# Altium PCB PCB1.PcbDoc (part 1 of 2)
Units mil, origin at the board's own origin, x right, y up, seen from the top; angles counter-clockwise.
Board outline 6000 x 4000 mil, 2 copper layers (Top Layer, Bottom Layer); 74 components, 70 nets, 267 pads, 158 vias.
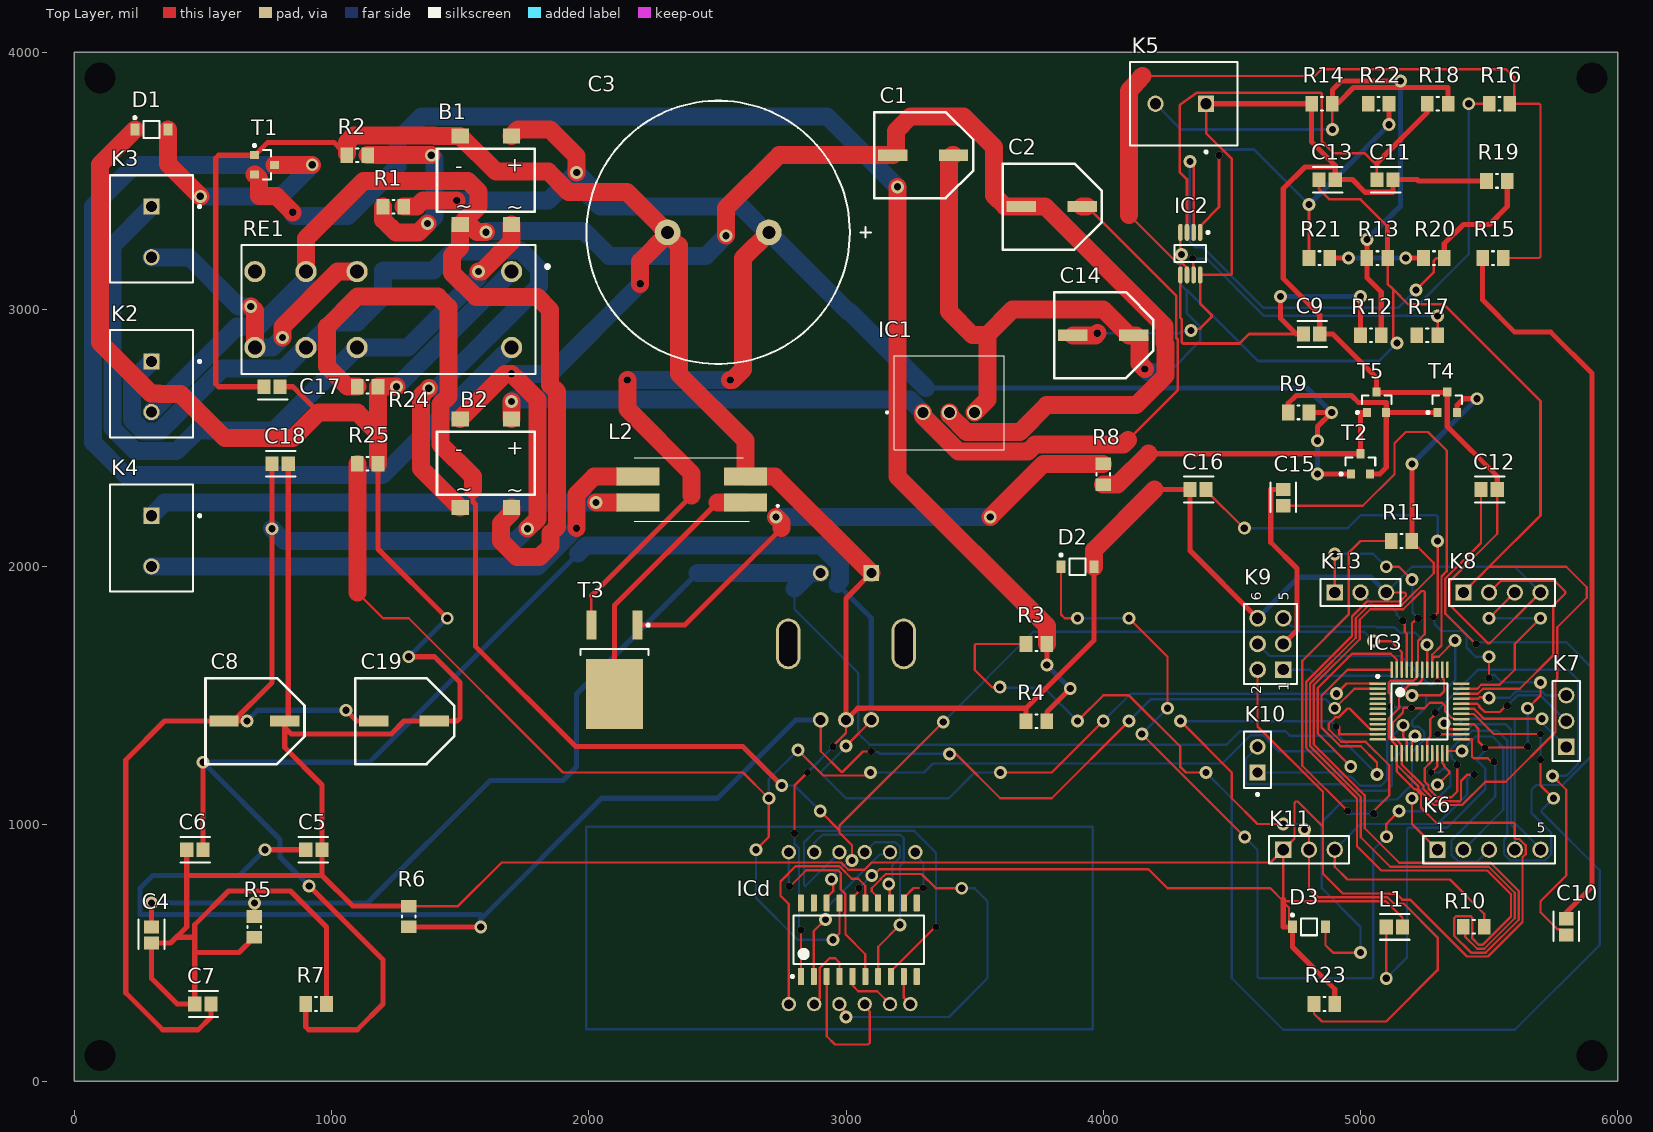
[diagram p0: Top Layer view]
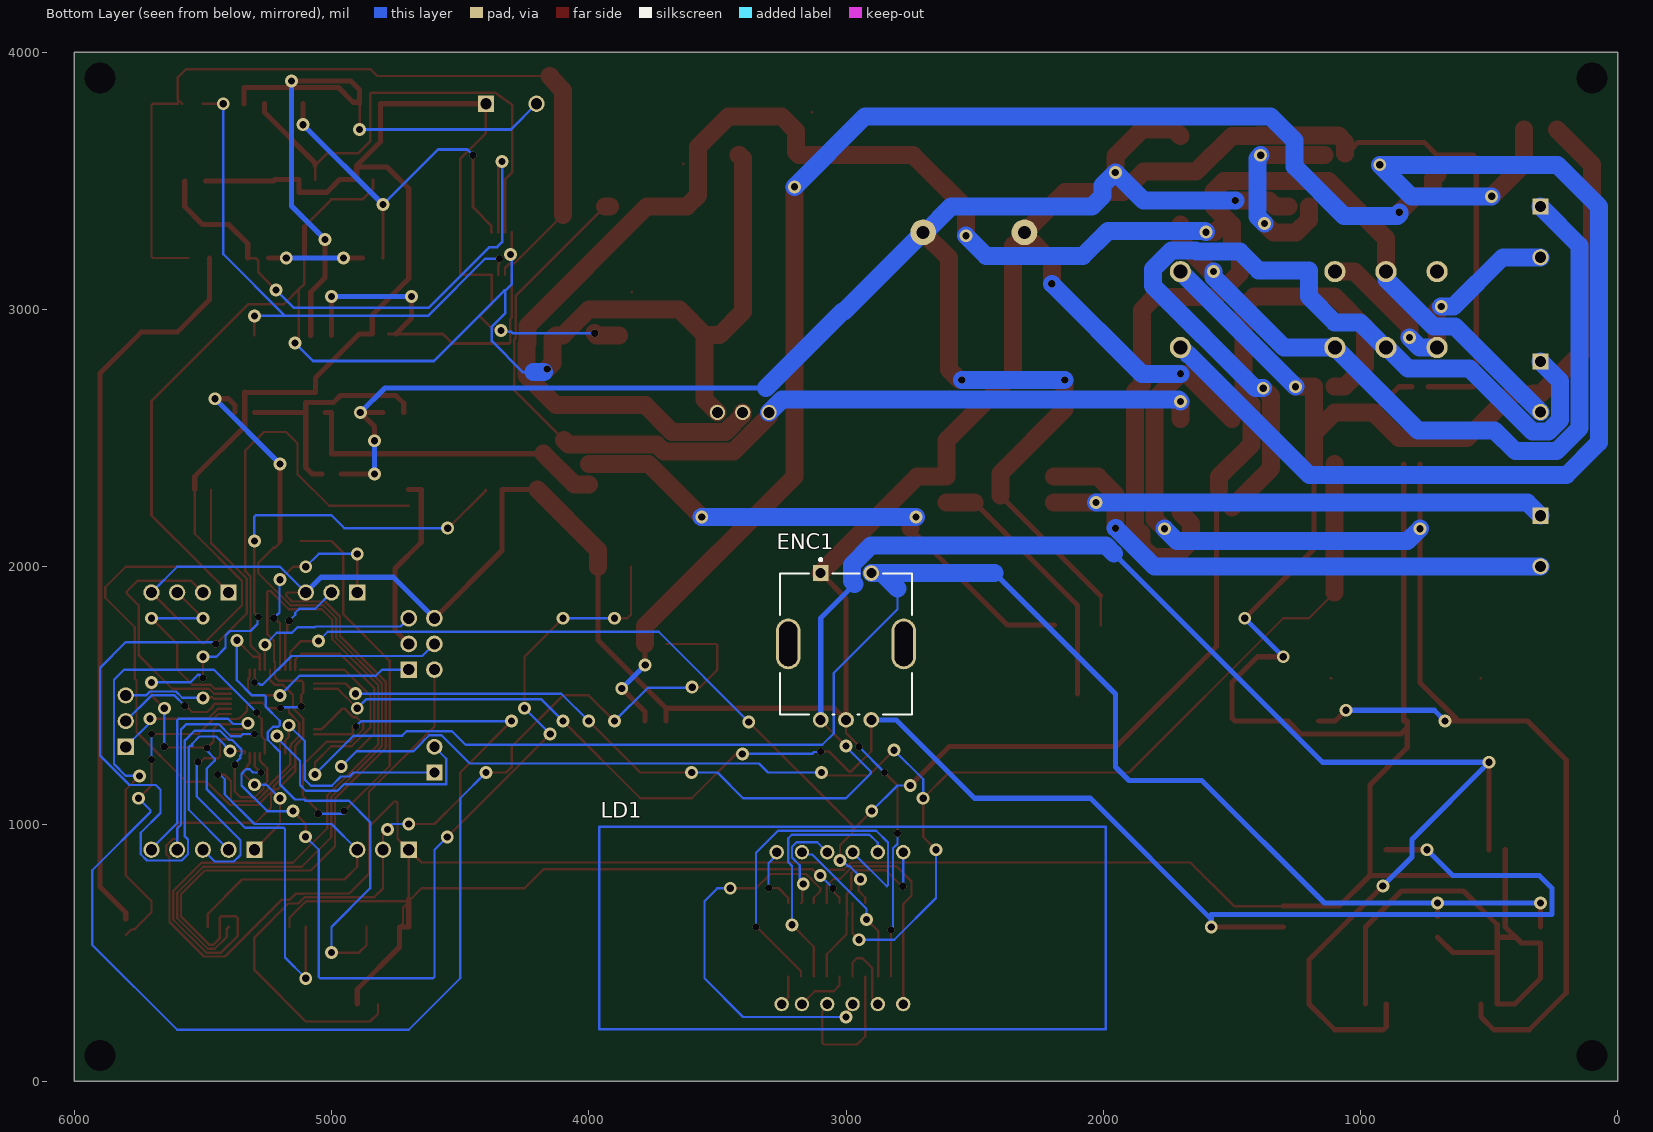
[diagram p1: Bottom Layer view, seen from below]

## Layer stack, top to bottom
Top Solder: solder mask 0.4, Solder Resist, Dk 3.5
Top Layer: signal copper 1.4
Dielectric 1: dielectric 12.6, FR-4, Dk 4.8
Bottom Layer: signal copper 1.4
Bottom Solder: solder mask 0.4, Solder Resist, Dk 3.5

## Board outline
0,0 6000,0 6000,4000 0,4000

## Design rules (kind name [scope] priority, off if disabled: settings)
Clearance [All] p1: gap=6 ignorepadtopadclearanceinfootprint=FALSE
ComponentClearance [All] p1: gap=5 collisioncheckmode=3 verticalgap=10 showdistances=FALSE
Height [All] p1: minheight=0 maxheight=5000 prefheight=500
HoleSize [All] p1: absolutevalues=TRUE maxlimit=200 minlimit=1 maxpercent=80.000 minpercent=20.000
MinimumSolderMaskSliver [All] p1: minsoldermaskwidth=0.5
PolygonConnect [All] p1: connectstyle=Relief reliefconductorwidth=10 reliefentries=4 polygonreliefangle="90 Angle" airgapwidth=10
RoutingVias [All] p1: holewidth=28 width=50 viastyle="Through Hole" minholewidth=28 minwidth=50 maxholewidth=28 maxwidth=50
SilkToSilkClearance [All] p1: silktosilkclearance=5
SilkToSolderMaskClearance [IsPad] p1: minsilkscreentomaskgap=5 clearancetoexposedcopper=TRUE
SolderMaskExpansion [All] p1: expansion=4 istentingtop=FALSE
Width [All] p1: maxlimit=100 minlimit=9 preferedwidth=9 minimp=50.000000 maximp=50.000000 favimp=50.000000
24 further rules are at their usual default settings.

## Classes and differential pairs
component class Voeding: B1 B2 C1 C2 C3 D1 D2 IC1 K2 K3 R1 R2 R3 R4 RE1 T1
component class Thermokoppel: C9 C10 C11 C12 C13 C14 IC2 K5 R12 R13 R14 R15 R16 R17 R18 R19 R20 R21 R22
component class PWM_soldeerbout: K4 L2 R8 R9 R10 R11 T2 T3 T4 T5
component class Display: C4 C5 C6 C7 C8 ENC1 ICd LD1 R5 R6 R7
component class CPU: C15 C16 C17 C18 C19 D3 IC3 K6 K7 K8 K9 K10 K11 K13 L1 R23 R24 R25

## Components (designator, comment, footprint, x,y, rotation, side; value= is the part's Value field where it differs from the comment)
B1 "D6KB6U" ttf 1600,3500 r0 top
B2 "D6KB6U" ttf 1600,2400 r0 top
C1 "10µ 50V" CE_D8_L10 3300,3600 r0 top
C2 "100µ 25V" CE_D8_L10 3800,3400 r0 top
C3 "4700µ 50V" CE_D25_L25_plugin 2306.3,3300 r0 top
C4 "10n" CC_0805_L 300,568.47 r90 top value="0.22 μF"
C5 "10n" CC_0805_L 931.53,900 r180 top value="0.22 μF"
C6 "10n" CC_0805_L 468.47,900 r0 top value="0.22 μF"
C7 "100n" CC_0805_L 500,300 r0 top value="0.22 μF"
C8 "100µ" CE_D8_L10 700,1400 r0 top
C9 "10n" CC_0805_L 4810.35,2905 r0 top value="0.22 μF"
C10 "10n" CC_0805_L 5800,600 r90 top value="0.22 μF"
C11 "10n" CC_0805_L 5095.35,3505 r0 top value="0.22 μF"
C12 "10n" CC_0805_L 5500,2300 r0 top value="0.22 μF"
C13 "100n" CC_0805_L 4870.35,3505 r0 top value="0.22 μF"
C14 "10µ" CE_D8_L10 4000,2900 r0 top
C15 "100n" CC_0805_L 4700,2268.47 r90 top value="0.22 μF"
C16 "100n" CC_0805_L 4368.47,2300 r0 top value="0.22 μF"
C17 "100n" CC_0805_L 768.47,2700 r0 top value="0.22 μF"
C18 "100n" CC_0805_L 800,2400 r0 top value="0.22 μF"
C19 "10µ" CE_D8_L10 1281.89,1400 r0 top
D1 "1N4007" SOD-123FL 300,3700 r0 top value=15pF
D2 "5V1" SOD-123FL 3900,2000 r0 top
D3 "Diode" SOD-123FL 4800,600 r0 top value=15pF
ENC1 "PEC11R-4220F-S0012" PEC11R_4220F_S0012 3000,1700 r180 bottom
IC1 "OKI-78SR-5/1.5-W36-C" OKI78SR515W36C 3299.21,2600 r0 top
IC2 "Dual_Opamp" MSOP_8_M 4338.39,3217.32 r270 top
IC3 "ATMEGA4809" TQFP_48_M 5229.53,1437.58 r0 top
ICd "TM1637" SOP_20_M 3050,550 r90 top
K2 "282836-2" TECO-282836-2_V 300,2700 r270 top
K3 "282836-2" TECO-282836-2_V 300,3301.57 r270 top
K4 "282836-2" TECO-282836-2_V 300,2100 r270 top
K5 "282836-2" TECO-282836-2_V 4301.58,3800 r180 top
K6 "" "pin header 1x5" 5500,900 r0 top
K7 "" "pin header 1x3" 5800,1400 r90 top
K8 "61300411121" "pin header 1x4" 5550,1900 r0 top
K9 "61300621121" "pin header 2x6" 4650,1700 r90 top
K10 "M20-9990246" "pin header 1x2" 4600,1250 r90 top
K11 "61300311121" "pin header 1x3" 4800,900 r0 top
K13 "61300311121" "pin header 1x3" 5000,1900 r0 top
L1 "Choke" CC_0805_L 5131.53,600 r0 top
L2 "" 2545 2400,2300 r90 top
LD1 "KW4-801AVB" 7-Segment 2974.41,300 r90 bottom
R1 "68K" R_0805_L 1240.35,3400 r0 top
R2 "10K" R_0805_L 1100,3600 r0 top
R3 "10K" R_0805_L 3740.35,1700 r0 top
R4 "4K7" R_0805_L 3740.35,1400 r0 top
R5 "10K" R_0805_L 700,600 r270 top
R6 "10K" R_0805_L 1300,640.35 r90 top
R7 "10K" R_0805_L 940.35,300 r180 top
R8 "100" R_0805_L 4000,2359.65 r90 top
R9 "4K7" R_0805_L 4759.65,2600 r0 top
R10 "4K7" R_0805_L 5440.35,600 r180 top
R11 "10K" R_0805_L 5159.65,2100 r0 top
R12 "5K6" R_0805_L 5040.35,2900 r0 top
R13 "1M" R_0805_L 5065.35,3200 r0 top
R14 "10M" R_0805_L 4850.35,3800 r0 top
R15 "100" R_0805_L 5515.35,3200 r0 top
R16 "18K" R_0805_L 5540.35,3800 r0 top
R17 "5K6" R_0805_L 5259.65,2900 r0 top
R18 "5K6" R_0805_L 5300.35,3800 r0 top
R19 "100" R_0805_L 5530.35,3500 r0 top
R20 "18K" R_0805_L 5285.35,3200 r0 top
R21 "18K" R_0805_L 4840.35,3200 r0 top
R22 "5K6" R_0805_L 5070.35,3800 r0 top
R23 "4K7" R_0805_L 4859.65,300 r0 top
R24 "4K7" R_0805_L 1140.35,2700 r0 top
R25 "4K7" R_0805_L 1140.35,2400 r0 top
RE1 "" RT42 1700,3000 r180 top
T1 "BC547" SOT_23 739.37,3562.6 r0 top
T2 "BC547" SOT_23 5000,2400 r90 top
T3 "IRF9Z34NPBF" TO_252 2100,1600 r270 top
T4 "BC547" SOT_23 5337.4,2639.37 r90 top
T5 "BC557" SOT_23 5062.6,2639.37 r90 top

## Footprints (in the part's own frame and the unit in brackets; to place one, negate y for a bottom-side part, rotate by r counter-clockwise, add the part's x,y. Pads: shape width x height; smd on the part's side, far side on the other; paste and mask are expansions set on the pad)
7-Segment [mm]
  round 1.425 hole 0.95: 1(0,-5) 2(0,-2.5) 3(0,0) 4(0,2.5) 5(0,5) 6(0,7) 7(15,-5) 8(15,-2.5) 9(15,0) 10(15,2.5) 11(15,5) 12(15,7.5)
  Top Layer lines w0.254: -2.5,-25 -2.5,15 -2.5,25 17.5,25 17.5,-25 -2.5,-25
2545 [mm]
  rect 1.78x4.27 smd: 1(-1.27,-5.305) 2(1.27,-5.305) 3(1.27,5.305) 4(-1.27,5.305)
  silkscreen extent -3.15,-8.6 3.15,5.69, body extent -3.15,-7.26 3.15,7.26, height 9.6
CC_0805_L [mil]
  rect 51.36x57.33 smd paste+0 mask+0: 1(-31.53,0) 2(31.53,0)
  silkscreen extent -55,-50 59,50, body extent -67,-39 67,39, height 10
CE_D8_L10 [mm]
  rect 2.9x1.1 smd: 1(-3,0) 2(3,0)
  Top Layer lines w0.254: -4.259,4.25 -4.25,4.241
  silkscreen extent -4.83,-4.25 4.95,4.25
CE_D25_L25_plugin [mm]
  round 2.54 hole 1.27: 1(0,0) 2(10,0)
  silkscreen extent -8,-13 20.07,13
MSOP_8_M [mm] "TSOP, 8-Leads, Body 3x3mm, Pitch 0.65mm, IPC Medium Density"
  oval 1.7x0.45 smd: 1(-2.1,0.975) 2(-2.1,0.325) 3(-2.1,-0.325) 4(-2.1,-0.975) 5(2.1,-0.975) 6(2.1,-0.325) 7(2.1,0.325) 8(2.1,0.975)
  silkscreen extent -2.22,-1.55 0.85,1.88, body extent -1.55,-1.55 1.55,1.55, height 1.1
OKI78SR515W36C [mm]
  round 1.519 hole 1.08: 1(0,0) 2(2.6,0) 3(5.1,0)
  silkscreen extent -3.6,-3.7 8.05,5.6, body extent -2.85,-3.7 8.05,5.6, height 16.6
PEC11R_4220F_S0012 [mm]
  rect 1.55x1.55 hole 1 paste-1000 mask+0: 1(-2.5,7)
  round 1.55 hole 1 paste-1000 mask+0: 2(2.5,7) A(-2.5,-7.5) B(2.5,-7.5) C(0,-7.5)
  rrect100% 2.4x5 hole 4.4 slot 1.8 at 0 deg paste-1000 mask+0: 3(-5.7,0) 4(5.7,0)
  silkscreen extent -6.5,-6.95 6.5,8.45, body extent -7,-7.7 7,7.2, height 27.3
"pin header 1x2" [mm]
  rect 1.57x1.57 hole 1.02 paste-1000 mask+0: 1(-1.27,0)
  round 1.57 hole 1.02 paste-1000 mask+0: 2(1.27,0)
  silkscreen extent -3.55,-1.32 2.79,1.32, body extent -2.89,-1.42 2.89,1.42, height 0.25
"pin header 1x3" [mm] "Pin Header, pitch 2.54 mm, THT, Vertical, single row, 3p"
  rect 1.6x1.6 hole 1.1: 1(-2.54,0)
  round 1.6 hole 1.1: 2(0,0) 3(2.54,0)
  silkscreen extent -3.96,-1.34 3.96,1.34, body extent -3.81,-1.27 3.81,1.27, height 8.57
"pin header 1x4" [mm] "Pin Header, pitch 2.54 mm, THT, Vertical, single row, 4p"
  rect 1.6x1.6 hole 1.1: 1(-3.81,0)
  round 1.6 hole 1.1: 2(-1.27,0) 3(1.27,0) 4(3.81,0)
  silkscreen extent -5.23,-1.34 5.23,1.34, body extent -5.08,-1.27 5.08,1.27, height 8.57
"pin header 1x5" [mm] "Pin Header, pitch 2.54 mm, THT, Vertical, single row, 5p"
  rect 1.6x1.6 hole 1.1: 1(-5.08,0)
  round 1.6 hole 1.1: 2(-2.54,0) 3(0,0) 4(2.54,0) 5(5.08,0)
  silkscreen extent -6.5,-1.34 6.5,1.34, body extent -6.35,-1.27 6.35,1.27, height 8.57
"pin header 2x6" [mm] "Pin Header, pitch 2.54 mm, THT, Vertical, dual row, 6p"
  rect 1.65x1.65 hole 1.1: 1(-2.54,-1.27)
  round 1.65 hole 1.1: 2(-2.54,1.27) 3(0,-1.27) 4(0,1.27) 5(2.54,-1.27) 6(2.54,1.27)
  silkscreen extent -3.96,-2.61 3.96,2.61, body extent -3.81,-2.54 3.81,2.54, height 8.59
R_0805_L [mm] "Chip Resistor, 2-Leads, Body 2.00x1.25mm, IPC Low Density"
  rect 1.25x1.55 smd: 1(-1.025,0) 2(1.025,0)
  silkscreen extent -0.1,-0.67 0.1,0.67, body extent -1.1,-0.72 1.1,0.72, height 0.5
RT42 [mm]
  round 2.1 hole 1.4: 11(20.3,-3.75) 12(15.26,-3.75) 14(25.34,-3.75) 21(20.3,3.75) 22(15.26,3.75) 24(25.34,3.75) A1(0,-3.75) A2(0,3.75)
  silkscreen extent -3.67,-6.35 26.65,6.35, body extent -2.21,-6.35 26.79,6.35, height 15.86
SOD-123FL [mm] "SOD, 2-Leads, Body 2.7x1.65mm"
  rect 0.91x1.22 smd: 1(-1.635,0) 2(1.635,0)
  silkscreen extent -1.76,-0.82 0.78,1.28, body extent -1.35,-0.82 1.35,0.82, height 1
SOP_20_M [mm] "SOIC,20-Leads,Body 12.9x5.6mm,Pitch 1.27mm,IPC Medium Density"
  rrect17% 1.65x0.6 smd: 1(-3.625,5.715) 2(-3.625,4.445) 3(-3.625,3.175) 4(-3.625,1.905) 5(-3.625,0.635) 6(-3.625,-0.635) 7(-3.625,-1.905) 8(-3.625,-3.175) 9(-3.625,-4.445) 10(-3.625,-5.715) 11(3.625,-5.715) 12(3.625,-4.445) 13(3.625,-3.175) 14(3.625,-1.905) 15(3.625,-0.635) 16(3.625,0.635) 17(3.625,1.905) 18(3.625,3.175) 19(3.625,4.445) 20(3.625,5.715)
  silkscreen extent -3.75,-6.45 2.4,6.69, body extent -2.8,-6.45 2.8,6.45, height 2
SOT_23 [mm] "SOT23, 3-Leads, Body 2.92x1.3mm, Pitch 0.95mm"
  rect 0.9x0.8 smd: 1(-1,0.95) 2(-1,-0.95) 3(1,0)
  silkscreen extent -1.12,-1.46 0.65,2.02, body extent -0.65,-1.46 0.65,1.46, height 1.11
TECO-282836-2_V [mm] "Female Header, Pitch 5mm, 1 x 2 Position, Height 10mm"
  rect 1.6x1.6 hole 1.1: 1(-2.5,0)
  round 1.6 hole 1.1: 2(2.5,0)
  silkscreen extent -5.6,-4.1 5,4.88, body extent -5.6,-4.1 5,4.1, height 10
TO_252 [mm] "DPAK, 3-Leads, Body 6.5x6.12mm, Pitch 2.28mm, IPC Low Density"
  rect 2.85x1 smd: 1(-4.4,2.28) 3(-4.4,-2.28)
  rect 6.9x5.65 smd: 2(2.4,0)
  silkscreen extent -4.52,-3.35 -1.45,3.46, body extent -2.05,-3.32 4.17,3.32, height 2.35
TQFP_48_M [mm]
  rect 1.655x0.252 smd paste+0 mask+0: 1(-4.125,2.75)
  rrect100% 1.655x0.252 smd paste+0 mask+0: 2(-4.125,2.25) 3(-4.125,1.75) 4(-4.125,1.25) 5(-4.125,0.75) 6(-4.125,0.25) 7(-4.125,-0.25) 8(-4.125,-0.75) 9(-4.125,-1.25) 10(-4.125,-1.75) 11(-4.125,-2.25) 12(-4.125,-2.75) 25(4.125,-2.75) 26(4.125,-2.25) 27(4.125,-1.75) 28(4.125,-1.25) 29(4.125,-0.75) 30(4.125,-0.25) 31(4.125,0.25) 32(4.125,0.75) 33(4.125,1.25) 34(4.125,1.75) 35(4.125,2.25) 36(4.125,2.75)
  rrect100% 0.252x1.655 smd paste+0 mask+0: 13(-2.75,-4.125) 14(-2.25,-4.125) 15(-1.75,-4.125) 16(-1.25,-4.125) 17(-0.75,-4.125) 18(-0.25,-4.125) 19(0.25,-4.125) 20(0.75,-4.125) 21(1.25,-4.125) 22(1.75,-4.125) 23(2.25,-4.125) 24(2.75,-4.125) 37(2.75,4.125) 38(2.25,4.125) 39(1.75,4.125) 40(1.25,4.125) 41(0.75,4.125) 42(0.25,4.125) 43(-0.25,4.125) 44(-0.75,4.125) 45(-1.25,4.125) 46(-1.75,4.125) 47(-2.25,4.125) 48(-2.75,4.125)
  silkscreen extent -4.25,-2.75 2.75,3.58, body extent -5.2,-5.2 5.2,5.2, height 0.25
ttf [mm]
  rect 1.7x1.5 smd: 1(2.54,4.445) 2(-2.54,4.445) 3(-2.54,-4.318) 4(2.54,-4.318)
  silkscreen extent -4.83,-3.03 4.83,3.17

## Part data
B1 B2: library part Bridge_Rectifier, Average Rectified Current-Max=0.8A, Forward Voltage=1V, Manufacturer="Diodes Inc", Package Description="4-Pin Small Outline Integrated Circuit, Body 4.7 x 3.8 mm, Pitch 2.5 mm", Package Reference=MiniDIP-4, Package Version=05/2016, Peak Current-Max=30A, Reverse Current-Max=5µA, Reverse Voltage-Max [Vrrm]=600V, Datasheet URL=http://www.diodes.com/_files/datasheets/ds17003.pdf, Datasheet Version="Rev. 13-2, 12/2010", Manufacturer URL=http://www.diodes.com/, Mounting Technology=SurfaceMount, Package URL=http://www.diodes.com/_files/packages/MiniDIP.pdf
C1 C2 C3 C8 C14 C19: library part Capacitor_Electrolytic, Manufacturer=Panasonic, Max Operating Temperature="105 degC", Min Operating Temperature="-55 degC", Package Quantity=500, Voltage Rating="25 V", ComponentLink1Description="Manufacturer URL", ComponentLink1URL=http://www.panasonic.com/, ComponentLink2Description=Datasheet, ComponentLink2URL=http://industrial.panasonic.com/cdbs/www-data/pdf/RDE0000/ABA0000C1181.pdf, DatasheetVersion=03/2016, Height="10.2 mm", Lead Pitch="3.1 mm", Length="10.2 mm", Mount="Surface Mount", Mounting Technology="Surface Mount", PackageDescription="2-Pin Electrolytic Aluminum Capacitor, Body 8.3 x 8.3 mm", PackageReference=EEE-FK1E221P, Packaging="Tape and Reel", Pins=2, REACH SVHC="No SVHC", RoHSCompliant=true
C4 C5 C6 C7 C9 C10 C11 C12 C13 C15 C16 C17 C18: library part Capacitor_Ceramic, Capacitance="0.22 μF", Manufacturer=KEMET, Manufacturer Part Number=C0805C224K5RACTU, Package=C0805C-DN, Temperature="-55°C to +125°C", Temperature Characteristic=X7R, Temperature Coefficient=30ppm/°C, Temperature Range High=+125°C, Temperature Range Low=-55°C, Tolerance=0.1, Voltage Rating="50 V", Automotive=No, Category=Cap, ComponentLink2Description=Datasheet, ComponentLink2URL=https://content.kemet.com/datasheets/KEM_C1003_C0G_SMD.pdf, Device Class L1="Passive Components", Device Class L2=Capacitors, Device Class L3="Ceramic Capacitors", Digikey Description="CAP CER 0.22UF 50V X7R 0805", Height=0.88mm, Ipc Land Pattern Name=CAPC200125X78, Lead Free=Yes, Material=Ceramic, Mouser Description="CAP CER 0.22UF 50V X7R 0805", Octopart=https://octopart.com/c0805c224k5ractu-kemet-144670, RoHS=TRUE
D1: library part Diode, Capacitance=15pF, Forward Current=1A, Manufacturer=Diotec, Max Junction Temp=+175°C, Max Repetitive Reverse Voltage=1000V, Max Surge Forward Current=27A, Peak Reverse Current=5uA, Temperature="-50°C to +175°C", Temperature Range Low=-50°C, Automotive=No, Category=Diode, ComponentLink2Description=Datasheet, ComponentLink2URL=https://datasheet.octopart.com/1N4007-Diotec-datasheet-62346875.pdf, Device Class L1="Discrete Semiconductors", Device Class L2=Diodes, Device Class L3="Rectifier Diodes", Height=2.8mm, Ipc Land Pattern Name=DIOAD888W100L520D280, Lead Free=Yes, Manufacturer Part Number=1N4007, Octopart=https://octopart.com/1n4007-diotec-4040411, Package=1N4007, Reverse Voltage=1000V, RoHS=TRUE, Temperature Range High=+175°C
D2: library part Zener_Diode, Manufacturer="On Semiconductor", PartNumber=1SMB5920BT3G, ComponentLink1Description="Manufacturer URL", ComponentLink1URL=http://www.onsemi.com/, ComponentLink2Description=Datasheet, ComponentLink2URL=http://www.onsemi.com/pub_link/Collateral/1SMB5913BT3-D.PDF, ComponentLink3Description="Package Specification", ComponentLink3URL=http://www.onsemi.com/pub_link/Collateral/1SMB5913BT3-D.PDF, DatasheetVersion="Rev. 8", Mounting Technology="Surface Mount", PackageDescription="2-Pin Small Molded Package, J-Bend Lead, Body 4.33 x 3.625 mm", PackageReference=SMB-2-403A-03_H, PackageVersion="Rev. H, 05/2011", Packing="Tape and Reel", RoHS=Pb-Free, VZ Typ (V)=6.2
D3: Capacitance=15pF, Forward Current=1A, Manufacturer=Diotec, Manufacturer Part Number=1N4007, Max Junction Temp=+175°C, Max Repetitive Reverse Voltage=1000V, Max Surge Forward Current=27A, Peak Reverse Current=5uA, Temperature="-50°C to +175°C", Temperature Range Low=-50°C, Automotive=No, Category=Diode, ComponentLink2Description=Datasheet, ComponentLink2URL=https://datasheet.octopart.com/1N4007-Diotec-datasheet-62346875.pdf, Device Class L1="Discrete Semiconductors", Device Class L2=Diodes, Device Class L3="Rectifier Diodes", Height=2.8mm, Ipc Land Pattern Name=DIOAD888W100L520D280, Lead Free=Yes, Octopart=https://octopart.com/1n4007-diotec-4040411, Package=1N4007, Reverse Voltage=1000V, RoHS=TRUE, Temperature Range High=+175°C
ENC1: "ROTARY ENCODER MECHANICAL 12PPR", Max Operating Temperature=70°C, Min Operating Temperature=-30°C, Package Quantity=150, Built in Switch=Yes, Detent=Yes, Encoder Type=Mechanical, Height=13.4mm, Hole Diameter=7mm, Length=26.5mm, Mount="Through Hole", Number of Channels=2, Number of Pins=5, Orientation=Vertical, Output Type=Quadrature, Packaging=Bulk, Pulses per Revolution=12, Radiation Hardening=No, REACH SVHC="No SVHC", RoHS Compliant=Yes, Series=PEC11R, Termination="PC Pin", Type=Mechanical, Width=12.5mm
IC1: "Non-Isolated DC/DC Converter, 7.5 W, 7 to 36 V, 1.5 A, -40 to 85 degC, 3-Pin THD, RoHS", Current - Output (Max)=1.5A, Manufacturer=Murata, Operating Temperature=-40degC~85degC, Package / Case=3-SIPModule, Power (Watts) - Manufacture Series=8W, Voltage - Input (Max)=36V, Voltage - Input (Min)=7V, Voltage - Isolation=-, Voltage - Output 1=5V, Applications=ITE(Commercial), Category=PowerSupplies-BoardMount, Datasheet URL=https://datasheet.ciiva.com/8006/1790439-8006672.pdf, Datasheet Version=Oct-13, Efficiency=90.5%, Family=DCDCConverters, Features=SCP, Manufacturer URL=http://www.murata.com/, Mounting Type=ThroughHole, Number of Outputs=1, Packaging=Tube, Power (Watts) - Max=8W, Series=Okami™OKI-78SR, Size / Dimension="0.41\"Lx0.30\"Wx0.65\"H(10.4mmx7.6mmx16.5mm)", Type=LinearRegulatorReplacement, Voltage - Output 2=-, Voltage - Output 3=-
IC2: Case/Package=PDIP, Input Bias Current=1pA, Input Offset Voltage (Vos)=4.5mV, Max Operating Temperature=125°C, Max Supply Voltage=6V, Min Operating Temperature=-40°C, Min Supply Voltage=1.8V, Nominal Supply Current=100uA, Operating Supply Voltage=5.5V, Output Current=23mA, Package Quantity=60, Power Supply Rejection Ratio (PSRR)=86dB, Voltage Gain=112dB, Amplifier Type="GENERAL PURPOSE", Bandwidth=1MHz, Common Mode Rejection Ratio=60dB, Gain Bandwidth Product=1MHz, Height=3.3mm, Input Offset Voltage-Max=4.5mV, Lead Free="Lead Free", Length=9.27mm, Mount="Through Hole", Number of Amplifiers=2, Number of Channels=2, Number Of Circuits=2, Number of Elements=2, Number of Pins=8, Operating Supply Current=100uA, Output Current per Channel=23mA, Packaging=Rail/Tube, Radiation Hardening=No, REACH SVHC="No SVHC", RoHS Compliant=Yes, Slew Rate=0.6V/µs, Slew Rate-Nom=0.6V/µs, Supply Current=100uA, Technology=CMOS, Unity Gain Bandwidth Product=1MHz, Width=6.35mm
IC3: Case/Package=TQFP, Max Operating Temperature=85°C, Min Operating Temperature=-40°C, Core Architecture=AVR, Interface=I2C, Memory Size=48KB, Memory Type=FLASH, Mount="Surface Mount", Number of I/Os=41, Oscillator Type=Internal, Peripherals="Brown-out Detect/Reset", RoHS Compliant=Yes, Series="megaAVR® 0, Functional Safety (FuSa)"
ICd: "LED Drive Control Special Circuit", Package=Package, Availability="Not in stock", Check_prices=https://www.snapeda.com/parts/TM1637/Titan+Micro+Electronics/view-part/?ref=eda, MF="Titan Micro Electronics", MP=TM1637, Price=None, SnapEDA_Link=https://www.snapeda.com/parts/TM1637/Titan+Micro+Electronics/view-part/?ref=snap
K2 K3 K4 K5: library part CMP-1684-00017-1, "Female Header, Pitch 5 mm, 1 x 2 Position, Height 10 mm, Tail Length 3.5 mm, Rohs, Bulk", Color=Green, Current=13.5A, Manufacturer="TE Connectivity", Package Description="Female Header, Pitch 5 mm, 1 x 2 Position, Height 10 mm, Tail Length 3.5 mm", Package Reference=THD, Standard Package=300, Voltage=300V, 3D Model=282836-2.pdf, Category=Connectors,Interconnects, Clamp Material - Plating=Brass-NickelPlated, Contact Material - Plating=Brass-TinPlated, Datasheet URL=http://www.te.com.cn/commerce/DocumentDelivery/DDEController?Action=showdoc&DocId=Catalog+Section%7F1308389_EUROSTYLE_TERMINAL_BLOCKS%7F0607%7Fpdf%7FEnglish%7FENG_CS_1308389_EUROSTYLE_TERMINAL_BLOCKS_0607.pdf%7F282836-2, Dynamic Catalog=BuchananSeries, Family=TerminalBlocks-WiretoBoard, Featured Product=EurostyleTerminalBlockConnectors, Features=Interlocking(Side), Housing Material=Polyamide(PA66),Nylon6/6, Manufacturer URL=http://www.te.com, Mating Orientation=HorizontalwithBoard, Mounting Type=ThroughHole, Number of Levels=1, Other Names="5ULV-02B / A98076", Packaging=Bulk, Pitch="0.197\"(5.00mm)", Positions Per Level=2, Product Training Modules=Wire-to-BoardEurostyleTerminalBlocks, RoHS Information=282836-2StatementofCompliance, Screw Material - Plating=Brass-NickelPlated, Screw Thread=M3, Series=Buchanan, Torque - Screw=0.68Nm(6Lb-In), Wire Gauge=16-30AWG, Wire Termination=Screw-RisingCageClamp
K6: library part "pin header 1x5", "THT Vertical Pin Header WR-PHD, Pitch 2.54 mm, Single Row, 5 pins", Contact Resistance=20mOhm, Manufacturer="Wurth Elektronik", Operating Temperature=-40to105degC, Package Reference=61300511121, Rated Current=3A, Withstanding Voltage=500VAC, Working Voltage=250VAC, Datasheet URL=https://katalog.we-online.de/em/datasheet/6130xx11121.pdf, Gender=Male, Manufacturer URL=http://www.we-online.de, Mounting Technology=THT, Orientation=Vertical, Packaging=Bag, Part Number=61300511121, Pin Number=5, Pitch=2.54mm, Publisher=WurthElektronik, Row Number=Single
K7: library part "pin header 1x3pin", "THT Vertical Pin Header WR-PHD, Pitch 2.54 mm, Single Row, 3 pins", Contact Resistance=20mOhm, Manufacturer="Wurth Elektronik", Operating Temperature=-40to105degC, Package Reference=61300311121, Rated Current=3A, Withstanding Voltage=500VAC, Working Voltage=250VAC, Datasheet URL=https://katalog.we-online.de/em/datasheet/6130xx11121.pdf, Gender=Male, Manufacturer URL=http://www.we-online.de, Mounting Technology=THT, Orientation=Vertical, Packaging=Bag, Part Number=61300311121, Pin Number=3, Pitch=2.54mm, Publisher=WurthElektronik, Row Number=Single
K8: library part "pin header 1x4", "THT Vertical Pin Header WR-PHD, Pitch 2.54 mm, Single Row, 4 pins", Contact Resistance=20mOhm, Manufacturer="Wurth Elektronik", Operating Temperature=-40to105degC, Rated Current=3A, Withstanding Voltage=500VAC, Working Voltage=250VAC, Datasheet URL=https://katalog.we-online.de/em/datasheet/6130xx11121.pdf, Gender=Male, Manufacturer URL=http://www.we-online.de, Mounting Technology=THT, Orientation=Vertical, Package Reference=61300411121, Packaging=Bag, Part Number=61300411121, Pin Number=4, Pitch=2.54mm, Publisher=WurthElektronik, Row Number=Single
K9: library part "pin header 2x6", "THT Vertical Pin Header WR-PHD, Pitch 2.54 mm, Dual Row, 6 pins", Contact Resistance=20mOhm, Manufacturer="Wurth Elektronik", Operating Temperature=-40to105degC, Rated Current=3A, Withstanding Voltage=500VAC, Working Voltage=250VAC, Datasheet URL=https://katalog.we-online.de/em/datasheet/6130xx21121.pdf, Gender=Male, Manufacturer URL=http://www.we-online.de, Mounting Technology=THT, Orientation=Vertical, Package Reference=61300621121, Packaging=Bag, Part Number=61300621121, Pin Number=6, Pitch=2.54mm, Publisher=WurthElektronik, Row Number=Dual
K10: library part "pin header 1x2", "CONN HEADER VERT 2POS 2.54MM", Current Rating=3A, Manufacturer=Harwin, Temperature="-40°C to +105°C", Temperature Range High=+105°C, Temperature Range Low=-40°C, Automotive=No, Category=Conn, ComponentLink2Description=Datasheet, ComponentLink2URL=https://cdn.harwin.com/pdfs/M20-999.pdf, Conn Gender=Male, Conn Orientation=Vertical, Contact Material=Tin,Nickel, Device Class L1=Connectors, Device Class L2="Headers and Wire Housings", Device Class L3=unset, Digikey Description="CONN HEADER VERT 2POS 2.54MM", Height=8.99mm, Lead Free=Yes, Manufacturer Part Number=M20-9990246, Mouser Description="2.54mm (0.1\") Pitch SIL Vertical PC Tail Pin Header, 6.1mm mating pin height, tin, 2 contacts", Number Of Contacts=2, Number Of Rows=1, Octopart=https://octopart.com/m20-9990246-harwin-2590635, Package=M20-9990246, Pitch=2.54mm, RoHS=TRUE
K11 K13: library part "pin header 1x3pin", "THT Vertical Pin Header WR-PHD, Pitch 2.54 mm, Single Row, 3 pins", Contact Resistance=20mOhm, Manufacturer="Wurth Elektronik", Operating Temperature=-40to105degC, Rated Current=3A, Withstanding Voltage=500VAC, Working Voltage=250VAC, Datasheet URL=https://katalog.we-online.de/em/datasheet/6130xx11121.pdf, Gender=Male, Manufacturer URL=http://www.we-online.de, Mounting Technology=THT, Orientation=Vertical, Package Reference=61300311121, Packaging=Bag, Part Number=61300311121, Pin Number=3, Pitch=2.54mm, Publisher=WurthElektronik, Row Number=Single
L1: "smoorspoel", Case/Package=1350, Current Rating=8.5A, DC Resistance (DCR)=14.1mR, Inductance=10uH, Inductance Tolerance=20%, Max Operating Temperature=155°C, Min Operating Temperature=-40°C, Package Quantity=1, Ratings=AEC-Q200, Resistor Type=Wirewound, Saturation Current=10A, Self Resonant Frequency=18MHz, Series Resistance=14.1R, Test Frequency=100kHz, Height=4.7mm, Height - Seated (Max)=0.197inch, Length=0.512inch, Max DC Current=8.5A, Mount="Surface Mount", Packaging="Tape and Reel", RMS Current (Irms)=8.5A, RoHS Compliant=Yes, Series=WE-HCI, Shielding=Shielded, Termination=SMD/SMT, Tolerance=20%, Width=12.8mm
L2: library part Common_Mode_Choke, Case/Package=1808, Current=2A, Current Rating=2.3A, DC Resistance (DCR)=60mR, Insulation Resistance=10MR, Max Operating Temperature=85°C, Max Voltage Rating (DC)=50V, Min Operating Temperature=-40°C, Package Quantity=1, Test Frequency=100MHz, DC Current=2A, DC Resistance-Max=60mR, Depth=4.7mm, Element Configuration=Dual, Height=2mm, Impedance=900R, Lead Free="Lead Free", Length=0.185inch, Max Current Rating=2A, Max DC Current=2A, Mount="Surface Mount", Number of Lines=2, Number of Pins=4, Packaging="Tape and Reel", Radiation Hardening=No, REACH SVHC="No SVHC", RoHS Compliant=Yes, Series=ACM, Termination=Flat, Voltage Rating=50V, Voltage Rating (DC)=50V, Width=4.5mm
LD1: "4-Digit LED Display"
R1 R2 R3 R4 R5 R6 R7 R8 R9 R10 R11 R12 R13 R14 R15 R16 R17 R18 R19 R20 R21 R22 R23 R24 R25: library part "0805 (Resistor)", "Resistor", Manufacturer="Vishay Dale", Part Number=CRCW08050000Z0EA
RE1: library part RELAY_GENERAL_PURPOSE, Ambient Temperature Range High=+85°C, Ambient Temperature Range Low=-40°C, Coil Power=403mW, Coil Resistance=62Ω, Coil Voltage=5V, Current Rating=8A, Manufacturer="TE Connectivity", Manufacturer Part Number=RT424005, Automotive=No, Category=Relay, Coil Type=Non-Latching, ComponentLink2Description=Datasheet, ComponentLink2URL=https://www.te.com/commerce/DocumentDelivery/DDEController?Action=showdoc&DocId=Data+Sheet%7FRT2%7F1014%7Fpdf%7FEnglish%7FENG_DS_RT2_1014.pdf%7F5-1393243-9, Device Class L1=Electromechanical, Device Class L2=Relays, Device Class L3="Power Relays", Digikey Description="RELAY GENERAL PURPOSE DPDT 8A 5V", Height=15.7mm, Lead Free=Yes, Mouser Description="General Purpose Relay, Rt2 Series, Power, Non Latching, Dpdt, 5 Vdc, 8 A Rohs Compliant: Yes", Number Of Contacts=2, Octopart=https://octopart.com/5-1393243-9-te+connectivity-41835766, Package=RT424005, RoHS=TRUE, Throw Configuration=DPDT
T1 T2 T4: library part Transistor_NPN, Manufacturer="On Semiconductor", PartNumber=BC547C, ComponentLink1Description="Manufacturer URL", ComponentLink1URL=http://www.onsemi.com/, ComponentLink2Description=Datasheet, ComponentLink2URL=http://www.onsemi.com/pub_link/Collateral/BC546-D.PDF, ComponentLink3Description="Package Specification", ComponentLink3URL=http://www.onsemi.cn/pub_link/Collateral/2N6426-D.PDF, DatasheetVersion="Rev. 7", fT Min (MHz)=150, IC Continuous (A)=0.1, Mounting Technology="Through Hole", PackageDescription="3-Pin Transistor Outline, Body 4.825 x 3.685 mm, Pitch 1.27 mm", PackageReference=TO-92-3-29-11_AM_SL, PackageVersion="Rev. AM", Packing="Bulk Box", Polarity=NPN, RoHS=FALSE
T3: library part MOSFET_P, Continuous Drain Current Id=2.4A, Current Temperature=25°C, Drain Source Voltage Vds=20V, Manufacturer="Fairchild Semiconductor", On Resistance Rds(on)=52mohm, Operating Temperature Max=150°C, Operating Temperature Min=-55°C, Operating Temperature Range=-55°Cto+150°C, Package / Case=SOT-23, Package Description="3-Pin Small Outline Transistor, Body 2.92 x 1.4 mm, Pitch 0.95 mm", Package Reference=SSOT3L, Package Version="Rev. 3, 05/2015", Power Dissipation Pd=500mW, Pulse Current Idm=10A, Rds(on) Test Voltage Vgs=-4.5V, Threshold Voltage Vgs Typ=-800mV, Voltage Vds Typ=-20V, Voltage Vgs th Max=-1.5V, Current Id Max=2.4A, Datasheet URL=https://www.fairchildsemi.com/datasheets/FD/FDN304P.pdf, Datasheet Version="Rev. C, 01/2001", External Depth=2.5mm, External Length / Height=1.12mm, External Width=3.05mm, Full Power Rating Temperature=25°C, Manufacturer URL=https://www.fairchildsemi.com/, Mounting Technology=SurfaceMount, No. of Pins=3, Package URL=https://www.fairchildsemi.com/package-drawings/MA/MA03B.pdf, Reel Quantity=3000, SMD Marking=304P, SVHC=NoSVHC(19-Dec-2012), Tape Width=8mm, Termination Type=SMD, Transistor Case Style=SOT-23, Transistor Polarity=PChannel, Voltage Vds=20V, Voltage Vgs Max=-800mV, Voltage Vgs Rds on Measurement=-4.5V
T5: library part Transistor_PNP, Manufacturer="On Semiconductor", PartNumber=BC557C, ComponentLink1Description="Manufacturer URL", ComponentLink1URL=http://www.onsemi.com/, ComponentLink2Description=Datasheet, ComponentLink2URL=http://www.onsemi.com/pub_link/Collateral/BC556B-D.PDF, ComponentLink3Description="Package Specification", ComponentLink3URL=http://www.onsemi.cn/pub_link/Collateral/2N6426-D.PDF, DatasheetVersion="Rev. 3", IC Continuous (A)=-0.1, Mounting Technology="Through Hole", PackageDescription="3-Pin Transistor Outline, Body 4.825 x 3.685 mm, Pitch 1.27 mm", PackageReference=TO-92-3-29-11_AM_SL, PackageVersion="Rev. AM", Packing="Bulk Box", Polarity=PNP, RoHS=FALSE

## Free pads (board coordinates)
  round 60 hole 120: 2(100,3900) 3(5900,3900) 5(100,100)
  round 100 hole 120: 4(5900,100)

## Via types
v1: diameter 50, hole 28, Top Layer to Bottom Layer, 116 vias
v2: diameter 28, hole 28, Top Layer to Bottom Layer, 42 vias

## Nets (pads, with @x,y where several pads share a name; then routed paths per layer and width w, separated by ;. In a path a pad name is that pad's centre, name@x,y a point inside that pad or via, vN(x,y) a via of type N, cw(c..) or ccw(c..) an arc to the next point about the centre after c; other vN are vias at no path point)
+5: C1.2 C4.1 C5.1 C6.1 C7.1 C8.2 C13.1 C14.2 C17.2 C18.2 C19.2 D1.1 D3.1 IC1.3 IC2.4 IC3.14 IC3.42 ICd.16 K8.1 K9.2 K11.1 L1.2 R5.2 R6.2 R7.1 R13.2 R23.2 R24.2 R25.2 RE1.A1 | length 28622.5
  Top Layer w9: R6.2 1491.71,680.71 1661.53,850.53 2980.8,850.53 3008.92,822.41 3072.21,822.41 3100.33,850.53 4650.53,850.53 K11.1@4693,893 ; ICd.16 3025,713.39 3046.36,734.75 3046.36,746.36 v2(3050,750) ; v1(3100,800) 3105.45,800 3129.95,824.5 4175.5,824.5 4250,750 4650,750 4700,700 ; K9.2 4600,1379.43 4854,1125.43 4854,989.4 ; 4700,709 K11.1@4700,886 ; K11.1 4743.4,943.4 4743.4,1082 4748.67,1087.27 4756.12,1087.27 4854,989.4 ; D3.1 4722.22,613.41 4722.22,674.78 4700,697 4700,700 ; 5140.95,1230 IC3.14 5140.95,1303.03 5136.73,1307.24 5136.73,1309.18 5110.19,1335.72 5110.19,1410.4 5150.45,1450.65 5150.45,1460.15 5150,1460.59 5150,1501.55 5190.37,1541.92 5221.29,1541.92 5239.37,1560 IC3.42 ; L1.2 5163.05,635.95 5099,700 4700,700 ; K8.1 5465,1965 ; 5500,2000 5800,2000 5879.5,1920.5 5879.5,1879.5 5765,1765 5765,1565 5758,1558 5758,1358 5564.4,1164.4 5485.61,1164.4 5394.94,1073.73 5286.31,1073.73 5225.04,1134.99 5225.04,1145.96 5141,1230 5141,1204.54 5210.04,1135.5 5214.7,1135.5 5235.5,1114.7 5235.5,1064.5 5295,1005 5594.73,1005 5600,999.73 5600,946.47 5604.74,941.73 5617.66,941.73 5642,917.4 5642,882.6 5630,870.61 5630,619 5496,485 5414,485 5193,706 5162.76,706 5140.35,728.41 5113.02,728.41 5111.43,730 4931,730 4854,807 4854,989.4
  Top Layer w10: v1@4300,3203.11 IC2.4 ; C13.1 4838.83,3469.17 4880,3428 5000,3428 5105.71,3322.29 ; R13.2 5105.71,3100 5128,3077.71 ; v1(5142,2870) 5128,2884 5128,3077.71 ; 5465,1965 5500,2000 5700,2200 5700,2644 5324,3020 5185.71,3020 5128,3077.71
  Top Layer w20: C6.1 436.95,800 ; R5.2 640.35,500 468.47,500 ; C17.2 850,2700 950,2600 ; C18.2 831.53,1400 C8.2 818,1400 818,1375 ; R7.1 980.71,600 840.71,740 600,740 468.47,608.47 468.47,559.65 ; R25.2 1180.71,2069.29 v1(1450,1800) ; R6.2 1082.35,680.71 963.05,800 ; v1(1300,1650) 1400,1650 1500,1550 1500,1411.72 1488.28,1400 C19.2 1282,1400 1232,1350 843,1350 818,1375 ; 4700,697 4700,600 D3.1 4735.63,522 4900,357.63 R23.2 ; 4700,700 4700,709 ; K11.1@4700,886 K11.1 ; R13.2 5105.71,3322.29 ; 373.89,536.95 436.95,600 436.95,800 ; 373.89,536.95 374,536.95 396.7,559.65 468.47,559.65 ; 373.89,536.95 C4.1 300,400 400,300 C7.1 468.47,500 ; 436.95,800 963.05,800 ; 468.47,500 468.47,559.65 ; 818,1375 818,1297 963.05,1151.95 C5.1 963.05,800
  Top Layer w70: D1.1 100,3564.37 100,2872 297.93,2674.07 330.03,2674.07 332.1,2672 413,2672 585,2500 850,2500 950,2600 1100,2600 1181,2519 ; R25.2 1181,2400 1181,2519 ; v1(1252.36,2700) R24.2 1181,2699.71 1181,2519 ; C1.2 3413.35,3600 3400,3586.65 3400,2992 3491.01,2900.99 3548.99,2900.99 3550,2902 ; IC1.3 3550,2650 3550,2902 ; v2(4161.7,2769.18) 4140.2,2790.69 4140.2,2886.65 4126.85,2900 4100,2900 4000,3000 3648,3000 3550,2902
  Bottom Layer w9: v2(3050,750) v1(3100,800)
  Bottom Layer w10: 4214.99,2757 4257,2757 4377,2877 4377,2933.34 4324,2986.34 4324,3073.96 ; v1(4304.56,3214.11) 4300,3203.11 4300,3097.96 4324,3073.96 ; v1(5142,2870) 5072,2800 4601.73,2800 4327.76,3073.96 4324,3073.96
  Bottom Layer w20: v1(1300,1650) v1(1450,1800)
  Bottom Layer w70: v1(1252.36,2700) RE1.A1 ; 4173.89,2757 4214.99,2757
GND: B1.2 B2.2 C3.1 C7.2 C8.1 C9.2 C11.2 C12.2 C13.2 C14.1 C16.1 C17.1 C18.1 C19.1 D2.2 ENC1.1 ENC1.C IC2.8 IC3.15 IC3.29 IC3.43 ICd.1 K5.1 K8.4 K9.6 K11.3 K13.3 L2.2 R2.1 R4.1 R10.1 R14.1 R19.1 T1.1 T4.3 T5.3 | length 30666.3
  Top Layer w9: v2(2800,963.98) 2800,1150 v2(2850,1200) ; ICd.1 v2(2825,588) ; v2(2950,1300) 2950,1303.35 3000,1353.35 ENC1.C ; K11.3 4900,834 4950,784 5347.71,784 5480.71,651 R10.1 ; K13.3 5170.79,1900 5176.06,1894.73 5176.06,1887.27 5153.79,1865 5025.81,1865 4967.02,1806.21 4967.02,1730.66 4788.79,1552.43 4788.79,1296.52 4986.5,1098.8 4986.5,913.5 5081,819 5492.79,819 5585,726.79 5585,640.21 5474.79,530 5460.21,530 5435.11,555.11 5435.11,634.86 5428.96,641.01 5371.04,641.01 5364.89,634.86 5364.89,565.14 5430.03,500 5487.21,500 5615,627.79 5615,739.21 5505.21,849 5151,849 5016.5,983.5 5016.5,1111.23 4818.79,1308.94 4818.79,1540 4997.02,1718.24 4997.02,1793.79 5038.24,1835 5166.21,1835 5237.27,1906.06 5244.73,1906.06 5250,1900.79 5250,1738.2 5223.5,1711.7 5223.5,1672.09 5223.9,1671.69 5223.9,1632.08 5219.69,1627.87 IC3.43 5219.69,1572.13 5215.47,1567.92 5215.47,1565.98 5206.41,1556.92 5117.11,1556.92 5110.19,1550 5110.19,1509.94 5117.67,1502.46 v2(5117.67,1457.26) ; v2@5194.86,1450 v2(5198.5,1451.5) ; IC3.29 5364.08,1408.05 5359.87,1412.27 5355.2,1412.27 5328.5,1438.97 5328.5,1460 5316.89,1471.61 5269.61,1471.61 5248,1450 5200,1450 v2(5198.5,1451.5) ; v2@5440.71,1199.9 v2(5442.26,1192.05) 5416.05,1192.05 5391,1167 5391,1094 5385.73,1088.73 5292.52,1088.73 5244.7,1136.54 5244.7,1147.51 5160.81,1231.4 5160.81,1274.98 IC3.15 5160.63,1303.03 5156.42,1307.24 5156.42,1310.71 5125.19,1341.93 5125.19,1393.38 5165.45,1433.64 5165.45,1446.23 5170.72,1451.5 v2(5198.5,1451.5) ; C12.2 5531.53,2128.53 5348,1945 5348,1850 5495.27,1702.73 5502.73,1702.73 K8.4
  Top Layer w10: v1(4341,2918.43) 4348.65,2926.08 4376.08,2926.08 4420.86,2970.86 4420.86,2979.14 4376.77,3023.23 IC2.8 4494.14,3134.64 4500,3140.5 4500,3585.36 4400,3685.36 K5.1
  Top Layer w20: C7.2 531.53,250 481.53,200 344,200 200,344 200,1249 351,1400 C8.1 C8.1@619,1400 ; v1(671,1400) C8.1@619,1400 ; C17.1 561.72,2700 550,2711.72 550,3588.28 561.72,3600 T1.1 701.97,3600 751.97,3650 1009.65,3650 1039.13,3620.51 1045.04,3620.51 1059.65,3605.91 R2.1 ; C18.1 v1(768.47,2148) 768.47,1549.47 C8.1@619,1400 ; v1(1056,1442) 1098,1400 C19.1 ; ENC1.1 3000,1877.16 ENC1.C 3045.28,1450 3077.92,1450 3079.16,1451.24 3117.69,1451.24 3118.93,1450 3700,1450 ; R4.1 3700,1450 ; D2.2 3964.37,1714.37 3700,1450 ; 4200,2300 C16.1 4336.95,2063.05 K9.6 ; K5.1 R14.1 4810,3652 4901.88,3560.12 4901.88,3554 ; T4.3 T4.3@5337.4,2678 ; R19.1 5226,3500 5221,3505 C11.2 5126.88,3456 5018,3456 4969,3505 C13.2 4901.88,3554 ; C12.2 5531.53,2351.47 5337.4,2545.6 T4.3@5337.4,2678 ; 4901.88,3554 4784,3554 4700,3470 4700,3120.88 4841.88,2979 C9.2 4892,2905 5062.6,2734.4 T5.3 5062.6,2678 T4.3@5337.4,2678
  Top Layer w70: R2.1@1059.65,3605.91 1059.65,3650 1085.65,3676 1401,3676 1402,3675 B1.2 1639,3536 1842.52,3536 1921.52,3457 2149.3,3457 C3.1 C3.1@2306.3,3293.4 ; B2.2 1675,2750 v2(1700,2750) ; 1716.49,2733.51 1800,2650 1800,2186 v1(1762,2148) ; v2(2200,3100) 2200,3187.1 C3.1@2306.3,3293.4 ; ENC1.1 2724.02,2350 L2.2 2608.86,2491.14 2350,2750 2350,3248.18 2306.3,3291.88 C3.1@2306.3,3293.4 ; C14.1 3969,2900 v2(3977,2908) ; D2.2 3964.37,2064.37 4200,2300
  Bottom Layer w9: v2(2800,963.98) 2800,922.63 2817,905.63 2817,596 v2(2825,588) ; v2(2850,1200) v2(2950,1300) ; K11.3 5000,1000 5300,1000 5415,1115 5415,1174.19 v2@5440.71,1199.9 ; K13.3 5200,2000 5600,2000 K8.4 ; v2(5117.67,1457.26) 5120.55,1454.38 5190.48,1454.38 v2@5194.86,1450
  Bottom Layer w10: v2(3977,2908) 4296,2908 4301,2913 4335.57,2913 v1(4341,2918.43)
  Bottom Layer w20: v1(671,1400) 713,1442 v1(1056,1442) ; K9.6 4759,1959 5041,1959 K13.3
  Bottom Layer w70: v1(768.47,2148) 816.47,2100 1714,2100 v1(1762,2148) ; v2(1700,2750) 1850,2750 v2(2200,3100)
K2: IC3.46 ICd.18 R24.1 | length 6914.2
  Top Layer w9: v1(2900,1050) 2975,975 ; ICd.18 2925,713.39 2950,738.39 2950,779.07 v1(2944.04,785.03) ; v1(3023.62,857.91) 3023.62,917.36 2975,965.98 2975,975 ; v1(3378,1397) 2975,994 2975,975 ; v1(5051,1711) 5118.63,1711 5160.63,1669 IC3.46
  Top Layer w20: 1549.54,2300 1549.54,2252.59 1559,2243.12 1559,1691 1949,1301 2599,1301 v1(2750,1150)
  Top Layer w70: R24.1 1062,2700 983.13,2778.87 983.13,2933.13 1100,3050 1412.99,3050 1454,3008.99 1454,2662.52 1424,2632.52 1424,2476 1549.54,2350.46 1549.54,2300
  Bottom Layer w9: v1(2750,1150) 2800,1150 v1(2900,1050) ; v1(2944.04,785.03) 2944.04,794.04 2985.36,835.36 2991.73,835.36 3014.28,857.91 v1(3023.62,857.91) ; v1(3378,1397) 3728,1747 5015,1747 v1(5051,1711)
K4: IC3.47 ICd.17 R25.1 | length 6668.1
  Top Layer w9: 1100,1900 1200,1800 1300,1800 1900,1200 2600,1200 v1(2700,1100) 2700,950 v1(2650,900) ; v1(2812.92,1287.08) 2911.27,1188.73 3083.59,1188.73 v1(3094.86,1200) ; v1(2950,550) 2975,575 ICd.17 ; v1(4962,1224) 4833.79,1352.21 4833.79,1528.51 4967.27,1662 5117.95,1662 5140.95,1639 IC3.47
  Top Layer w70: 1100,1900 R25.1
  Bottom Layer w9: v1(2650,900) 2650,712.8 2812.8,550 v1(2950,550) ; v1(2700,1100) 2700,1174.16 v1(2812.92,1287.08) ; v1(3094.86,1200) 3303,1200 3338.5,1235.5 4462.5,1235.5 4572.41,1345.41 4620,1345.41 4645,1320.41 4645,1319 4681,1283 4903,1283 v1(4962,1224)
NetB1_3: B1.3 B2.4 C1.1 C2.1 IC1.2 K2.2 RE1.11 | length 8588.4
  Top Layer w70: RE1.11 900.79,3276.79 1124,3500 1530,3500 1571.01,3458.99 1571.01,3401.01 B1.3@1517.67,3347.67 ; v1(1600,3300.7) 1564.65,3300.7 1535.35,3330 B1.3 1500,3241 1469,3210 1469,3142.48 1562.48,3049 1800,3049 1850,2999 1850,2707.48 1876,2681.48 1876,2154.52 1852,2130.52 1852,2081.01 1808.99,2038 1721,2038 1659,2100 1659,2169 1700,2210 B2.4 ; v1(2534,3287) 2534,3395 2739,3600 C1.1 3194,3612.11 3194,3694 3250,3750 3457.48,3750 3576,3631.48 3576,3443 3619,3400 C2.1 3774.48,3400 4238,2936.48 4238,2869.46 4243,2864.46 4243,2743 4128.2,2628.2 3780.24,2628.2 3676.04,2524 3468.52,2524 3401.57,2590.95 IC1.2
  Bottom Layer w70: K2.2 633.13,2934.7 716.18,2934.7 898.36,3116.88 898.36,3145.21 RE1.11 ; v1(1600,3300.7) 1605.28,3305.98 1982.15,3305.98 2079.13,3209 2456,3209 v1(2534,3287)
NetB1_4: B1.4 K3.1 RE1.22 | length 2929.4
  Top Layer w70: v1(1570.96,3148) 1583.92,3148 1700,3264.08 B1.4
  Bottom Layer w70: K3.1 148,3248 148,2538.61 237.04,2449.57 398.09,2449.57 478.52,2530 776.85,2530 RE1.22 1297.24,2852.36 1570.96,3126.08 v1(1570.96,3148)
NetB2_1: B2.1 C2.2 IC1.1 | length 3729.1
  Top Layer w10: C2.2@3937,3400 4284,3053 4284,2888.52 4289,2883.52 4289,2685.52 4096.64,2493.16
  Top Layer w70: B2.1 v1(1700,2642.52) ; IC1.1 3299.21,2585.83 3437.04,2448 3707.52,2448 3735.52,2476 4079.48,2476 4096.64,2493.16 ; C2.2 C2.2@3937,3400
  Bottom Layer w70: v1(1700,2642.52) 1707.48,2650 3249.21,2650 IC1.1
NetB2_3: B2.3 K2.1 RE1.21 | length 3441
  Top Layer w70: v1(1378,2694) 1348,2664 1348,2382 B2.3
  Bottom Layer w70: K2.1 224,2722.43 224,2570.09 268.52,2525.57 331.48,2525.57 575.93,2770.02 815.02,2770.02 897.36,2852.36 RE1.21 904.22,2852.36 1001.86,2950 1100,2950 1200,3050 1200,3151.57 1200.43,3152 1395.48,3152 1468.18,3224.7 1636.91,3224.7 1642.19,3229.98 1734.11,3229.98 1807,3157.08 1807,3092 1409,2694 v1(1378,2694)
NetC9_1: C9.1 IC2.5 R12.1 | length 1387.7
  Top Layer w10: IC2.5 4300,2968 4305,2963 4305,2873.86 4310.86,2868 4530,2868 4567,2905 4750,2905 C9.1
  Top Layer w20: v1(4689,3051) 4689,2966 4750,2905 ; R12.1 v1(5000,3051)
  Bottom Layer w20: v1(4689,3051) v1(5000,3051)
NetC10_2: C10.2 R15.1 | length 2867.9
  Top Layer w20: R15.1 5475,3037 5600,2912 5740,2912 5900,2752 5900,756 5800,656 C10.2
NetC11_1: C11.1 IC2.3 R18.1 | length 1889.2
  Top Layer w10: IC2.3 4325.59,3505.77 4296.77,3534.58 4296.77,3793.63 4302.63,3799.49 4363.95,3842.5 4835.86,3842.86 4844.14,3842.86 4850,3837 4850,3654 4897,3607 5016.83,3607 5063.83,3560 C11.1
  Top Layer w20: 5063.83,3560 5063.83,3569.83 5260,3766 R18.1
NetC15_1: C15.1 D3.2 IC3.40 | length 3757.7
  Top Layer w9: C15.1 5008.95,2236.95 5132,2360 5132,2480 5176,2524 5263,2524 5335.5,2451.5 5335.5,1983.07 5315,1962.57 5315,1693.92 5278.74,1657.66 5278.74,1640 ; D3.2 4864.37,528.74 4893.11,500 v1(5000,500) ; IC3.40 5278.74,1640 ; v1(5368,1714) 5304,1650 5288.74,1650 5278.74,1640
  Bottom Layer w9: v1(5000,500) 5000,600 4850,750 4850,1007.98 4932.52,1090.5 5102,1090.5 5107,1095.5 5141.5,1095.5 5200,1154 5200,1279.94 5247.91,1327.85 5247.91,1357.26 5227.12,1378.05 5206.78,1378.05 5201.51,1383.32 5201.51,1401.51 5255.27,1455.27 5255.27,1494.73 5260.54,1500 5309.5,1500 5368,1558.5 v1(5368,1714)
NetC15_2: C15.2 K9.3 | length 713.2
  Top Layer w20: K9.3 4753,1753 4753,1993 4651,2095 4651,2300 C15.2
NetC16_2: C16.2 IC3.28 L1.1 | length 3995.7
  Top Layer w9: C16.2 4400,2297.02 4547.02,2150 v1(4548.51,2150) ; v1(5100,400) L1.1 ; v2(5284,1805.14) 5300,1821.14 v1(5300,2100) ; IC3.28 5440.42,1388.37 5459,1369.79 5459,1320.5 v2(5484.5,1295) 5484.5,1284.5 5487,1297.5 v2@5647.5,1297.5 ; v2@5500,1565.5 v1(5500,1650) ; v1(5650,1450) 5700,1500 v1(5700,1550.5)
  Bottom Layer w9: v1(4548.51,2150) 4950,2150 5000,2200 5294.73,2200 5300,2194.73 v1(5300,2100) ; v1(5100,400) 5180.92,480.92 5180.92,979.73 5186.2,985 5335,985 5485.6,1135.6 5485.6,1214.6 5453.83,1246.37 5453.83,1253.83 5484.5,1284.5 v2@5487,1297.5 ; v2(5284,1805.14) 5287.64,1796.36 5287.64,1777.36 5315,1750 5394.73,1750 5411.9,1732.83 5411.9,1685.69 5447.59,1650 v1(5500,1650) ; v2(5500,1567) 5512.77,1579.77 5520.23,1579.77 5549.5,1550.5 v1(5700,1550.5) ; v2@5647.5,1297.5 v2(5650,1300) v1(5650,1450)
NetD1_2: D1.2 RE1.A2 T1.3 | length 4667.1
  Top Layer w70: D1.2 364.37,3565.63 v1(490,3440) ; T1.3 v1(925,3562.6)
  Bottom Layer w70: v1(490,3440) 802.4,3440 v1(925,3562.6) 234.6,3562.6 72,3400 72,2484 200,2356 1198.52,2356 1668.52,2826 1670.21,2826 1696.57,2852.36 RE1.A2
NetIC2_1: IC2.1 R21.1 R22.2 | length 1506.8
  Top Layer w10: IC2.1 4379.29,3302.52 4379.29,3327.13 4450,3397.83 v2(4450,3600) ; R21.1 v1(4800,3408)
  Top Layer w20: v1(5110.71,3718.71) R22.2
  Bottom Layer w10: v2(4450,3600) 4472,3622 4586,3622 v1(4800,3408)
  Bottom Layer w20: v1(4800,3408) v1(5110.71,3718.71)
NetIC2_2: IC2.2 R19.2 R20.2 | length 2255.6
  Top Layer w10: v1(4337,3575) 4351.18,3560.82 IC2.2 ; v1(5216,3076) 5285,3145 5285,3190 5295,3200 R20.2
  Top Layer w20: R20.2 5325.71,3256.71 5400,3331 5501.71,3331 5570.71,3400 R19.2
  Bottom Layer w10: v1(4337,3575) 4337,3262 4356.58,3242.42 4385.87,3242.42 4621.28,3007 5147,3007 v1(5216,3076)
NetIC2_6: IC2.6 R15.2 R16.2 | length 3611.8
  Top Layer w9: 4100,3368.46 4289.85,3178.61 4308.02,3178.61 4325.59,3161.04 IC2.6 ; 4152.23,3908.01 4822.01,3908.01 4848,3934 5566,3934 5597.54,3902.46 5597.54,3816.83 R16.2 ; R15.2 5694.73,3200 5700,3205.27 5700,3794.73 5694.73,3800 5597.86,3800 5597.86,3805.41 R16.2@5595.4,3807.87
  Top Layer w70: 4100,3368.46 4100,3850 4149.42,3905.2 ; 4102.27,3852.53 4102.32,3852.59 ; 4102.28,3852.55 4102.32,3852.59 ; 4102.31,3852.58 4149.42,3905.2 ; 4102.32,3852.59 4149.42,3905.2 ; 4102.32,3852.59 4149.42,3905.2 ; 4102.32,3852.59 4149.42,3905.2 ; 4149.42,3905.2 4149.59,3905.37 ; 4149.59,3905.37 4152.23,3908.01 4149.59,3905.37
NetIC2_7: IC2.7 R16.1 R17.2 | length 2187.3
  Top Layer w10: v2(4346.53,3197.03) 4351.18,3165.7 IC2.7 ; R17.2 v1(5300,2975) ; v1(5421,3800) R16.1
  Bottom Layer w10: v2(4346.53,3197.03) 4350.52,3197.62 4402.38,3197.62 4625,2975 5180,2975 ; v1(5300,2975) 5180,2975 ; v1(5421,3800) 5421,3216 5180,2975
NetIC3_11: IC3.11 K11.2 R23.1 | length 3079.2
  Top Layer w9: v1(4300,1400) 4500,1200 4500,1100 4600,1000 v1(4700,1000) ; v1(4782.68,978.43) 4800,961.11 K11.2 4800,749.41 4834.41,715 5105.21,715 5129.21,691 5168,691 5300,559 5300,432 5100,232 4850,232 4819.29,262.71 R23.1 ; v2(4905.22,1379.04) 4916.32,1379.04 4917.36,1377.99 4917.36,1349 IC3.11
  Bottom Layer w9: v1(4300,1400) 4884.26,1400 v2(4905.22,1379.04) ; v1(4700,1000) 4765.35,1000 4782.68,982.68 v1(4782.68,978.43)
NetIC3_16: IC3.16 K10.1 | length 887.3
  Top Layer w9: v1(5166.01,1383.99) 5166.01,1338.75 5180.32,1324.44 IC3.16
  Bottom Layer w9: K10.1 4914.49,1200 4930,1184.49 4963.42,1184.49 4999.5,1148.41 5080,1148.41 5103.5,1171.91 5103.5,1321.49 v1(5166.01,1383.99)
NetIC3_17: IC3.17 K10.2 | length 1053.2
  Top Layer w9: IC3.17 5200.18,1275.34 5200.18,1319.23 5212.41,1331.46 v1(5212.41,1342.55)
  Bottom Layer w9: K10.2 4554,1254 4554,1154.5 4951.5,1154.5 4976.59,1129.41 5100,1129.41 5122.5,1151.91 5122.5,1245.5 5212.41,1335.41 v1(5212.41,1342.55)
NetIC3_23: IC3.23 K6.1 | length 515.4
  Top Layer w9: v1(5200,1100) 5200,1000 K6.1 ; v1(5300,1152.67) 5344.84,1197.5 5344.84,1204.96 5325.22,1224.57 5325.22,1230.05 5318.29,1236.98 5318.29,1274.98 IC3.23
  Bottom Layer w9: v1(5200,1100) 5252.67,1152.67 v1(5300,1152.67)
NetIC3_24: IC3.24 K6.2 | length 735
  Top Layer w9: IC3.24 5337.8,1284 v1(5394,1284)
  Bottom Layer w9: v1(5394,1284) 5415,1305 5415,1307 5448,1340 5514,1340 5541.77,1312.23 5541.77,1304.74 5549.26,1304.74 5555,1299 5555,1055 K6.2
NetIC3_25: IC3.25 K6.3 | length 813.2
  Top Layer w9: IC3.25 5433.5,1329.31 5433.5,1262 5440,1255.5 5494.91,1255.5 5508.41,1242 v2(5519.5,1242)
  Bottom Layer w9: K6.3 5454,854 5380,854 5354,880 5354,937 5524,1107 5524,1237.5 v2(5519.5,1242)
NetIC3_26: IC3.26 K6.4 | length 882.5
  Top Layer w9: v2(5300,1350) 5300.82,1349.18 5391.77,1349.18 IC3.26
  Bottom Layer w9: v2(5300,1350) 5344.09,1350 5352.57,1341.52 5391.52,1341.52 5438.37,1388.37 5563.96,1388.37 5585,1367.33 5585,997.42 5600,982.42 K6.4
NetIC3_27: IC3.27 K6.5 | length 907.8
  Top Layer w9: v1(5325.4,1391.72) 5348.43,1368.68 IC3.27
  Bottom Layer w9: v1(5325.4,1391.72) 5328.8,1388.46 5381.69,1388.46 5402.23,1409 5594.73,1409 5600,1403.73 5600,1003.63 5700,903.63 K6.5
NetIC3_31: IC3.31 K7.1 | length 478.1
  Top Layer w9: IC3.31 5442.2,1447.42 5480.27,1409.35 v1(5706,1409.35)
  Bottom Layer w9: v1(5706,1409.35) 5706,1394 K7.1
NetIC3_32: IC3.32 K7.2 | length 490.9
  Top Layer w9: IC3.32 5454.09,1467.11 5461.2,1460 5461.2,1457.32 5483.04,1435.48 5541.08,1435.48 5565.6,1460 v2(5571,1460)
  Bottom Layer w9: v2(5571,1460) 5611,1500 5700,1500 K7.2
NetIC3_33: IC3.33 K7.3 | length 427.3
  Top Layer w9: IC3.33 5457.8,1486.79 5463.16,1492.16 5498.34,1492.16 v1(5500,1490.5)
  Bottom Layer w9: v1(5500,1490.5) 5580.29,1490.5 5604.79,1515 5706.21,1515 5721.21,1500 K7.3
NetIC3_34: IC3.34 K8.2 | length 1019.6
  Top Layer w9: IC3.34 5456.27,1506.48 5475.99,1526.19 5483.44,1526.19 5483.64,1526 5619.52,1526 5750,1656.48 5750,1850 5796.27,1896.27 5796.27,1903.73 5754,1946 5546,1946 K8.2
NetIC3_35: IC3.35 K8.3 | length 821.6
  Top Layer w9: IC3.35@5391.95,1526.16 5454.74,1526.16 5469.78,1541.19 5489.66,1541.19 5489.85,1541 5541,1541 5600,1600 5600,1700 v1(5700,1800) ; v1(5500,1800) K8.3
  Bottom Layer w9: v1(5500,1800) v1(5700,1800)
NetIC3_38: IC3.38 K9.1 | length 759.5
  Top Layer w9: v1(5200,1500) 5309,1500 5324.5,1515.5 5324.5,1560.15 5322.33,1562.32 5322.33,1567.91 5318.29,1571.95 5318.29,1599.82 IC3.38
  Bottom Layer w9: K9.1 4804,1600 4828,1576 5124,1576 v1(5200,1500)
NetIC3_39: IC3.39 K9.4 | length 820.2
  Top Layer w9: IC3.39 5298.61,1599.82 5298.61,1551.39 v2(5300,1550)
  Bottom Layer w9: K9.4 4647,1653 5156,1653 5268,1541 5276.86,1541 5282.22,1546.36 5296.36,1546.36 v2(5300,1550)
NetIC3_41: IC3.41 K9.5 | length 698.7
  Top Layer w9: v1(5259,1697) 5259.06,1696.94 IC3.41
  Bottom Layer w9: K9.5 4732,1768 5061.02,1768 5064.02,1765 5132.3,1765 5154.06,1743.24 5212.76,1743.24 v1(5259,1697)
NetIC3_44: IC3.44 K13.1 | length 865
  Top Layer w9: K13.1 v1(4900,2050) ; v1(5100,2000) 5150,2000 v1(5200.1,1949.9) ; IC3.44 5200,1780.25 5206.36,1786.61 5206.97,1786.61 5220.36,1800 v2(5224.84,1800)
  Bottom Layer w9: v1(4900,2050) 5050,2050 v1(5100,2000) ; v1(5200.1,1949.9) 5202.54,1947.46 5202.54,1822.3 v2(5224.84,1800)
NetIC3_45: IC3.45 K13.2 | length 410.2
  Top Layer w9: v2(5164.5,1790.1) 5164.5,1786.55 5172.34,1775.16 5172.34,1747.97 5180.32,1740 IC3.45
  Bottom Layer w9: K13.2 5063,1837 5125,1837 5140.83,1821.17 5140.83,1813.77 v2(5164.5,1790.1)
NetICd_2: ICd.2 LD1.11 | length 624.1
  Top Layer w9: ICd.2 2875,584 v1(2920,629)
  Bottom Layer w9: v1(2920,629) 2920,670.2 3131.33,881.54 3162.25,881.54 LD1.11
NetICd_3: ICd.3 LD1.4 | length 574.8
  Top Layer w9: ICd.3 2925,175 2957.29,142.71 3085.72,142.71 3092.71,149.71 3092.71,271.18 3072.83,291.06 LD1.4
NetICd_4: ICd.4 LD1.2 | length 302.6
  Top Layer w9: LD1.2 2898,322.02 2898,440 2936,478 2958,478 2975,461 ICd.4
NetICd_5: ICd.5 LD1.5 | length 210.8
  Top Layer w9: ICd.5 3025,373 3048,350 3121.26,350 LD1.5
NetICd_6: ICd.6 LD1.7 | length 809.6